# Altium PCB PCBV_DIY_2.PcbDoc
Units mm, origin at the board's own origin, x right, y up, seen from the top; angles counter-clockwise.
Board outline 30 x 30 mm, 2 copper layers (Top Layer, Bottom Layer); 35 components, 33 nets, 143 pads, 14 vias.
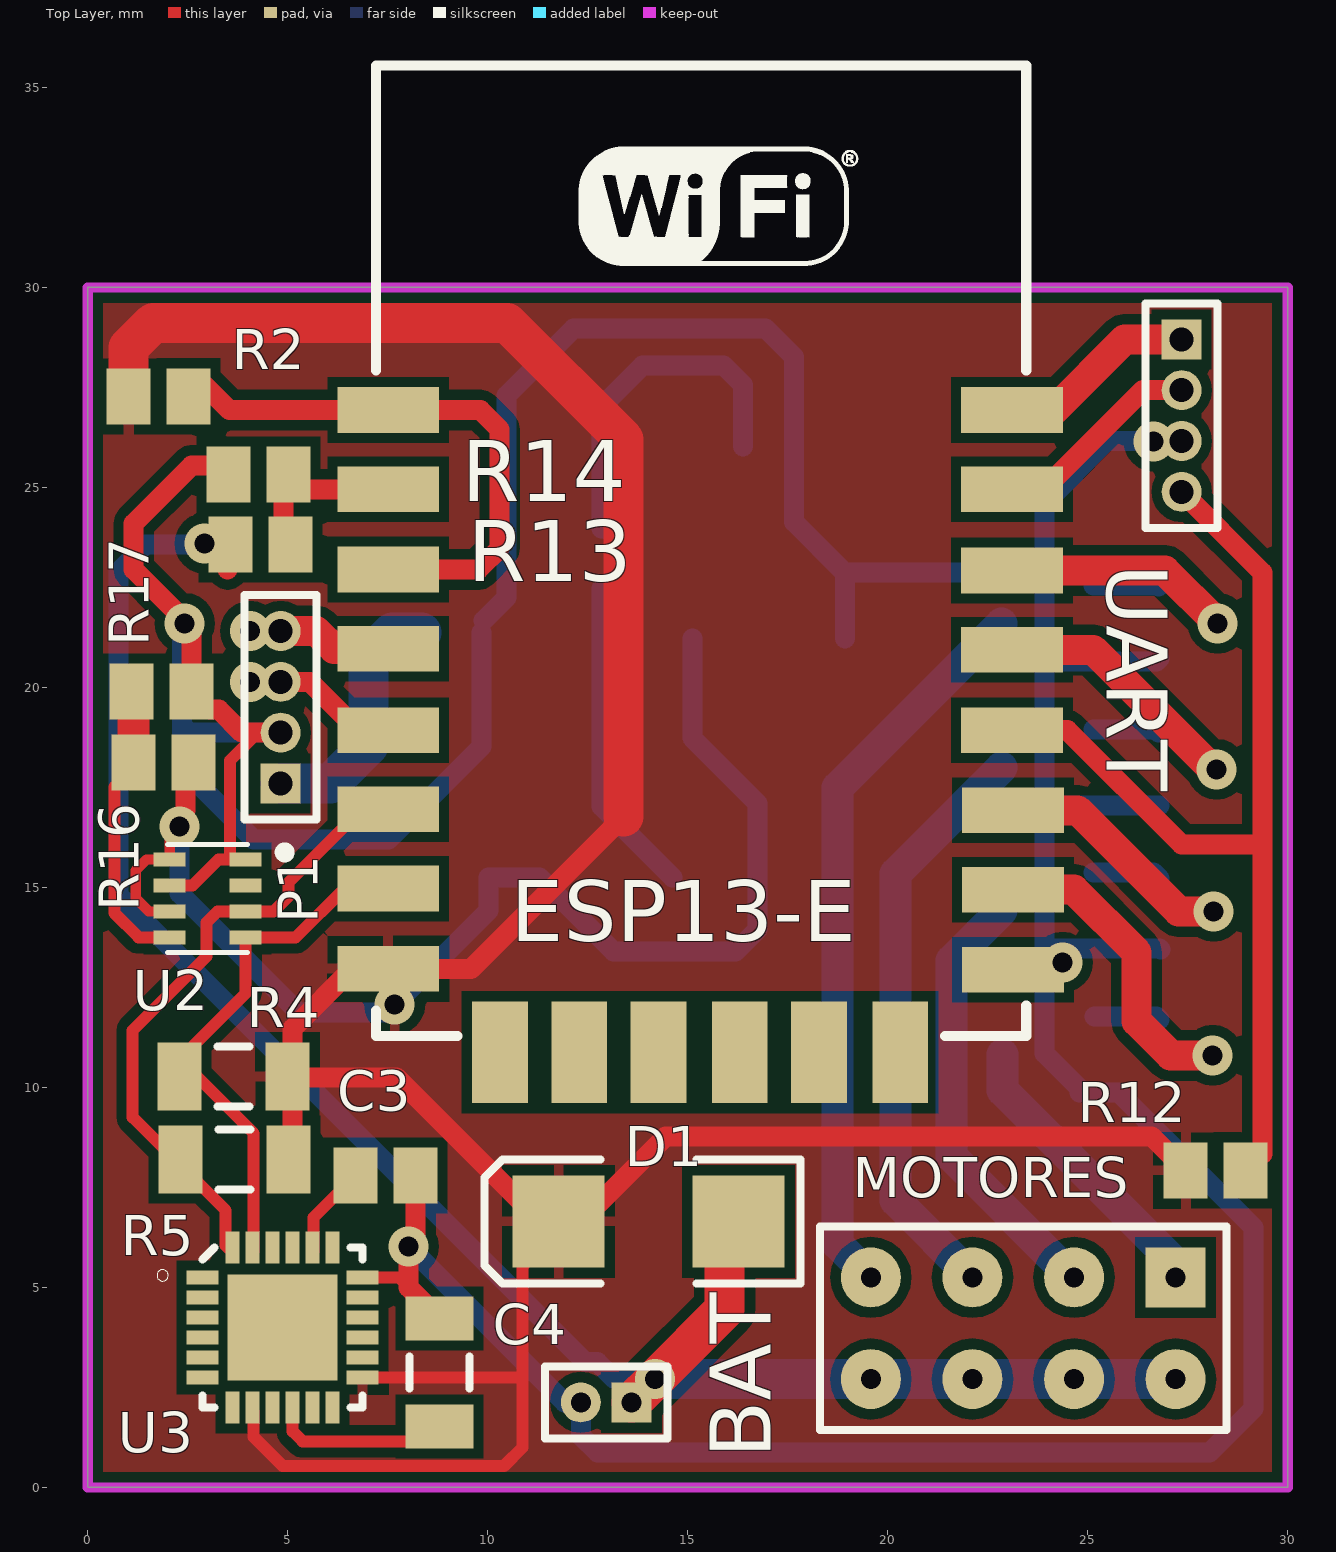
[diagram p0: Top Layer view]
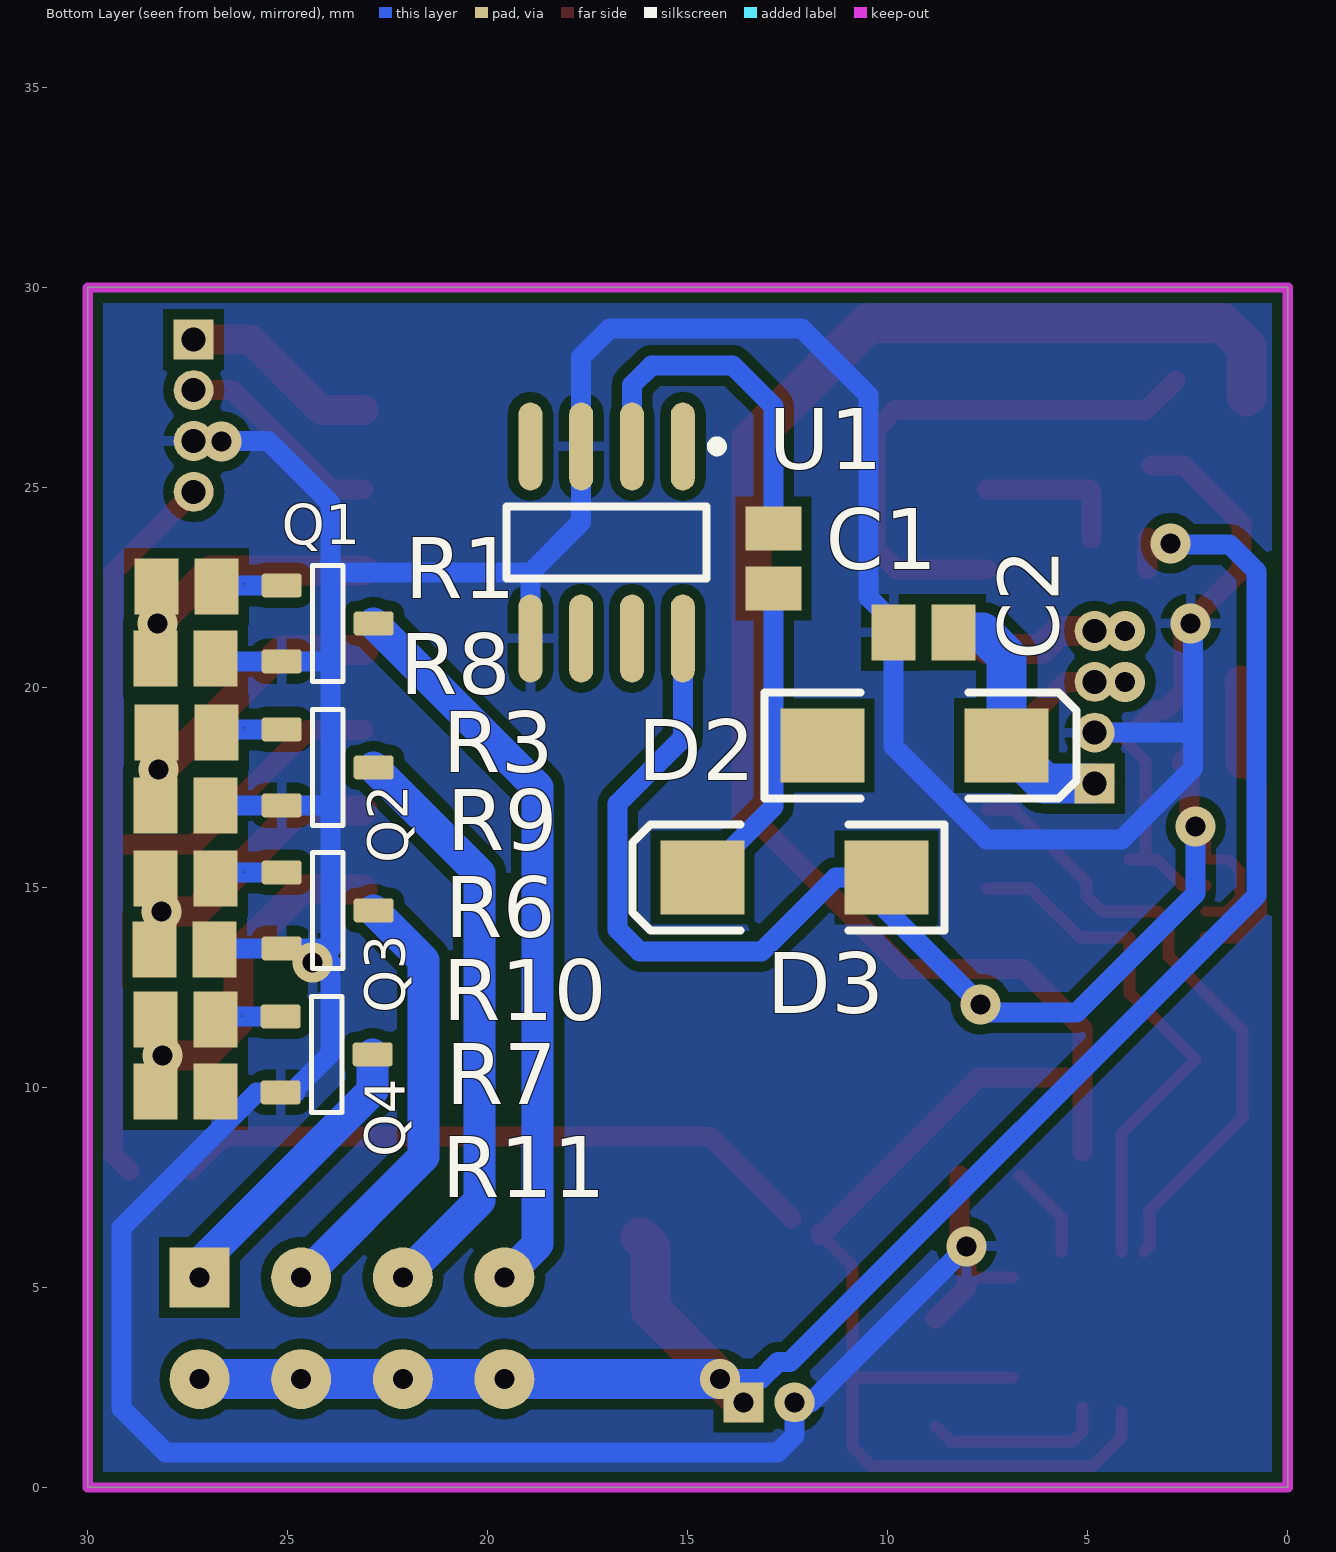
[diagram p1: Bottom Layer view, seen from below]

## Layer stack, top to bottom
Top Solder: solder mask 0.0102, Solder Resist, Dk 3.5
Top Layer: signal copper 0.0356
Dielectric 1: dielectric 0.32, FR-4, Dk 4.8
Bottom Layer: signal copper 0.0356
Bottom Solder: solder mask 0.0102, Solder Resist, Dk 3.5

## Board outline
0,0 30,0 30,30 0,30

## Design rules (kind name [scope] priority, off if disabled: settings)
Clearance [All] p1: gap=0.256 except(0.15: Arc-SMDPad Track-SMDPad SMDPad-SMDPad; 0.4: Arc-Region Track-Region SMDPad-Region THPad-Region Via-Region Fill-Region Poly-Region Region-Region)
PolygonConnect [All] p1: connectstyle=Relief reliefconductorwidth=0.254 reliefentries=4 polygonreliefangle="90 Angle" airgapwidth=0.254
RoutingVias [All] p1: holewidth=0.711 width=1.27 viastyle="Through Hole" minholewidth=0.711 minwidth=1.27 maxholewidth=0.711 maxwidth=1.27
SolderMaskExpansion [All] p1: expansion=0.102
Width [All] p1: maxlimit=2 minlimit=0.256 preferedwidth=0.5
30 further rules are at their usual default settings.

## Components (designator, comment, footprint, x,y, rotation, side; value= is the part's Value field where it differs from the comment)
BAT "Header 2" MHDR1X2 13.6,2.125 r180 top
C1 "Cap" C0805 12.85,23.225 r270 bottom
C2 "Cap" C0805 9.1,21.375 r180 bottom
C3 "Cap" C0805 7.45,7.8 r0 top
C4 "Cap" C1206 8.8,2.875 r90 top
D1 "Diode 1N5402" DSO-C2/X2.3 14.025,6.65 r180 top
D2 "Diode 1N5402" DSO-C2/Z6.7 9.325,18.55 r180 bottom
D3 "Diode 1N5402" DSO-C2/Z6.7 12.325,15.25 r0 bottom
ESP13-E "ESP8266 ESP-12-E" "ESP8266 ESP-12-E B" 24.1,10.525 r0 top
MOTORES "Header 4X2" HDR2X4 27.2,5.25 r180 top
P1 "MHDR1X4" MHDR1X4 4.825,17.6 r90 top
Q1 "MOSFET-N" SOT23-3 24,21.6 r180 bottom
Q2 "MOSFET-N" SOT23-3 24,18 r180 bottom
Q3 "MOSFET-N" SOT23-3 24,14.425 r180 bottom
Q4 "MOSFET-N" SOT23-3 24.025,10.825 r180 bottom
R1 "Res3" C0805 27.525,22.525 r180 bottom
R2 "Res3" C0805 1.775,27.275 r0 top
R3 "Res3" C0805 27.525,18.875 r180 bottom
R4 "Res3" C1206 3.65,10.275 r0 top
R5 "Res3" C1206 3.675,8.2 r0 top
R6 "Res3" C0805 27.55,15.225 r180 bottom
R7 "Res3" C0805 27.55,11.7 r180 bottom
R8 "Res3" C0805 27.55,20.725 r180 bottom
R9 "Res3" C0805 27.55,17.05 r180 bottom
R10 "Res3" C0805 27.575,13.45 r180 bottom
R11 "Res3" C0805 27.55,9.9 r180 bottom
R12 "Res3" C0805 28.2,7.925 r0 top
R13 "Res3" C0805 4.325,23.575 r0 top
R14 "Res3" C0805 4.275,25.325 r180 top
R16 "Res3" C0805 1.9,18.125 r0 top
R17 "Res3" C0805 1.85,19.9 r0 top
U1 "LMC7660IM" M08A_N 17.025,23.625 r270 bottom
U2 "BMP280" LGA-8_BMP280(Primary) 3,14.725 r0 top
U3 "MPU-6050" QFN50P400X400X95-25N 4.875,4 r0 top
UART "MHDR1X4" MHDR1X4 27.35,28.7 r270 top

## Footprints (in the part's own frame and the unit in brackets; to place one, negate y for a bottom-side part, rotate by r counter-clockwise, add the part's x,y. Pads: shape width x height; smd on the part's side, far side on the other; paste and mask are expansions set on the pad)
C0805 [mm] "Chip Capacitor, Body 2.0x1.3mm, IPC High Density"
  rect 1.1x1.4 smd: 1(-0.75,0) 2(0.75,0)
  body extent -1.1,-0.72 1.1,0.72, height 1.4
C1206 [mm] "Chip Capacitor, Body 3.2x1.6mm, IPC High Density"
  rect 1.1x1.7 smd: 1(-1.35,0) 2(1.35,0)
  silkscreen extent -0.4,-0.75 0.4,0.75, body extent -1.7,-0.9 1.7,0.9, height 1.3
DSO-C2/X2.3 [mm] "DO-214-AA/SMB; 2 C-Bend Leads; Body 5.3 x 3.6 mm, inc. leads (LxW)"
  rect 2.3x2.3 smd: 1(-2.25,0) 2(2.25,0)
  silkscreen extent -3.8,-1.55 4.1,1.55
DSO-C2/Z6.7 [mm] "DO-214-AC/SMA; 2 C-Bend Leads; Body 5.3 x 2.6 mm, inc. leads (LxW)"
  rect 2.1x1.85 smd: 1(-2.3,0) 2(2.3,0)
  silkscreen extent -3.75,-1.33 4.05,1.33
"ESP8266 ESP-12-E B" [mil] "ESP8266 ESP-12-E"
  rect 100x45 smd: 1(-653,646) 2(-653,568) 3(-653,489) 4(-653,411) 5(-653,331) 6(-653,253) 7(-653,175) 8(-653,96) 15(-38,95) 16(-38,174) 17(-38,252) 18(-39,331) 19(-39,410) 20(-39,488) 21(-39,568) 22(-39,646)
  rect 55x100 smd: 9(-543,14) 10(-465,14) 11(-387,14) 12(-307,14) 13(-229,14) 14(-149,14)
  silkscreen extent -665,30 -25,985
HDR2X4 [mm] "Connector; Header; 4x2 Position"
  rect 1.5x1.5 hole 0.5: 1(0,0)
  round 1.5 hole 0.5: 2(0,2.54) 3(2.54,0) 4(2.54,2.54) 5(5.08,0) 6(5.08,2.54) 7(7.62,0) 8(7.62,2.54)
  silkscreen extent -1.27,-1.27 8.89,3.81
LGA-8_BMP280(Primary) [mm]
  rect 0.8x0.35 smd paste-25.4 mask-25.4: 1(0.95,0.975) 2(0.95,0.325) 3(0.95,-0.325) 4(0.95,-0.975) 5(-0.95,-0.975) 6(-0.95,-0.325) 7(-0.95,0.325) 8(-0.95,0.975)
  silkscreen extent -1,-1.35 2.02,1.35
M08A_N [mm] "SOIC, 8-Leads, Body 4.9x3.9mm, Pitch 1.27mm, IPC Medium Density"
  oval 2.2x0.6 smd: 1(-2.4,1.905) 2(-2.4,0.635) 3(-2.4,-0.635) 4(-2.4,-1.905) 5(2.4,-1.905) 6(2.4,-0.635) 7(2.4,0.635) 8(2.4,1.905)
  silkscreen extent -2.52,-2.5 0.9,2.88, body extent -2,-2.5 2,2.5, height 1.75
MHDR1X2 [mm] "Connector; Header; 2 Position"
  rect 1x1 hole 0.5: 1(0,0)
  round 1 hole 0.5: 2(1.27,0)
  silkscreen extent -0.9,-0.9 2.17,0.9
MHDR1X4 [mm] "Connector; Header; 4 Position"
  rect 1x1 hole 0.6: 1(0,0)
  round 1 hole 0.6: 2(1.27,0) 3(2.54,0) 4(3.81,0)
  silkscreen extent -0.9,-0.9 4.71,0.9
QFN50P400X400X95-25N [mm]
  rect 0.8x0.35 smd paste-25.4 mask-25.4: 1(-2,1.25) 2(-2,0.75) 3(-2,0.25) 4(-2,-0.25) 5(-2,-0.75) 6(-2,-1.25) 13(2,-1.25) 14(2,-0.75) 15(2,-0.25) 16(2,0.25) 17(2,0.75) 18(2,1.25)
  rect 0.35x0.8 smd paste-25.4 mask-25.4: 7(-1.25,-2) 8(-0.75,-2) 9(-0.25,-2) 10(0.25,-2) 11(0.75,-2) 12(1.25,-2) 19(1.25,2) 20(0.75,2) 21(0.25,2) 22(-0.25,2) 23(-0.75,2) 24(-1.25,2)
  rect 2.75x2.65 smd mask-25.4: 25(0,0)
  silkscreen extent -3.14,-2 2,2
SOT23-3 [mm] "SOT23, 3 pin"
  round 0.5 on Mech15: 0(0,0)
  rrect25% 1x0.6 smd: 1(-1.15,0.95) 2(-1.15,-0.95) 3(1.15,0)
  silkscreen extent -0.38,-1.45 0.38,1.45, body extent -1.4,-1.45 1.4,1.45, height 1.29

## Part data
BAT: "Header, 2-Pin"
C1 C2 C3 C4: "Capacitor"
D1 D2 D3: "3 Amp General Purpose Rectifier"
MOTORES: "Header, 4-Pin, Dual row"
P1 UART: "Header, 4-Pin"
Q1 Q2 Q3 Q4: "N-Channel MOSFET"
R1 R2 R3 R4 R5 R6 R7 R8 R9 R10 R11 R12 R13 R14 R16 R17: "Resistor"
U1: "Switched Capacitor Voltage Converter, 8-pin Narrow SOIC"
U2: "Barometro"

## Via types
v1: diameter 1, hole 0.5, Top Layer to Bottom Layer, 14 vias

## Nets (pads, with @x,y where several pads share a name; then routed paths per layer and width w, separated by ;. In a path a pad name is that pad's centre, name@x,y a point inside that pad or via, vN(x,y) a via of type N, cw(c..) or ccw(c..) an arc to the next point about the centre after c; other vN are vias at no path point)
5VCC: C2.2 D2.2 P1.1 | length 6.4
  Bottom Layer w1: P1.1 6.075,17.6 D2.2 7.025,20.775 7.625,21.375 C2.2
ADC: ESP13-E.2 R13.2 R14.1 | length 3.8
  Top Layer w0.5: R13.2@4.9,23.725 4.9,24.9 4.952,24.952 ESP13-E.2
BOOT: ESP13-E.18 R12.2 UART.4 | length 25.4
  Top Layer w0.5: ESP13-E.18 24.493,18.932 27.35,16.075 29.366,16.075 ; UART.4 29.366,22.874 29.366,16.075 ; R12.2 29.366,8.341 29.366,16.075
ECHO: ESP13-E.4 P1.4 | length 2.9
  Top Layer w0.75: P1.4 5.715,21.41 6.161,20.964 ESP13-E.4
  other v1: 4.062,21.41
GND: BAT.2 C2.1 C3.2 C4.2 ESP13-E.15 P1.2 Q1.2 Q2.2 Q3.2 Q4.2 R8.2 R9.2 R10.2 R11.2 R14.2 R17.2 U1.3 U1.5 U2.1 U2.7 U3.18 UART.3 | length 128
  Top Layer w0.3: U2.7 2.625,15.05 3.275,15.7 ; U2.1 3.275,15.7 ; 4.242,18.858 3.556,18.171 3.556,15.7 3.275,15.7 ; U3.18 7.775,5.25 8.025,5
  Top Layer w0.5: R17.2 3.059,19.442 3.284,19.442 3.855,18.87 P1.2 ; R17.2@2.6,20.1 2.6,21.5 1.15,22.95 1.15,24.1 2.6,25.55 R14.2@3.4,25.55 ; C3.2 8.2,6.2 v1(8.025,6.025) 8.025,5 C4.2
  Bottom Layer w0.5: v1@2.363,21.6 2.363,19.05 ; P1.2 2.543,18.87 2.363,19.05 ; v1(8.025,6.025) 11.925,2.125 BAT.2 12.33,1.295 12.75,0.875 28.05,0.875 29.15,1.975 29.15,6.5 25.775,9.875 Q4.2 24.8,9.875 24.8,9.975 23.925,10.85 v1@23.925,13.125 ; C2.1 9.85,18.525 7.525,16.2 4.15,16.2 2.363,17.987 2.363,19.05 ; C2.1@9.9,21.675 10.475,22.25 10.475,27.3 12.15,28.975 16.95,28.975 17.66,28.265 U1.3 17.66,24.14 18.93,22.87 ; U1.5 18.93,22.87 ; R9.2 Q2.2 23.95,17.05 23.925,17.075 ; R8.2 26.725,20.65 Q1.2 23.925,20.65 ; R10.2 26.8,13.475 Q3.2 23.95,13.475 23.925,13.45 23.925,17.075 ; UART.3 25.485,26.16 23.925,24.6 23.925,22.9 ; 18.93,22.87 23.895,22.87 23.925,22.9 ; 23.925,17.075 23.925,20.65 ; 23.925,20.65 23.925,22.9
  other v1: 24.375,13.125 2.425,21.6 26.65,26.15
GPIO_1: ESP13-E.9
GPIO_2: ESP13-E.10
GPIO_3: ESP13-E.11
I2C_SCL: ESP13-E.7 R4.1 U2.4 U3.23 | length 13.4
  Top Layer w0.3: U3.23@4.15,5.9 4.15,8.85 2.3,10.7 3.95,12.35 U2.4 5.2,13.75 6.42,14.97 ESP13-E.7
I2C_SDA: ESP13-E.6 R5.1 U2.3 U3.24 | length 15.9
  Top Layer w0.3: U3.24@3.594,5.9 3.45,6.044 3.45,6.925 1.125,9.25 1.125,11.425 2.975,13.275 2.975,14.125 3.25,14.4 U2.3 4.65,14.4 5.025,14.775 5.025,15.125 6.851,16.951 ESP13-E.6
NetC1_1: C1.1 U1.2 | length 8.8
  Bottom Layer w0.5: C1.1 12.85,27.025 13.875,28.05 15.9,28.05 16.39,27.56 U1.2
NetC1_2: C1.2 D2.1 D3.2 | length 8
  Bottom Layer w0.5: C1.2 12.85,17.025 D3.2
NetC3_1: C3.1 U3.20 | length 2.3
  Top Layer w0.3: U3.20@5.65,5.9 5.65,6.75 C3.1
NetC4_1: C4.1 U3.10 | length 4.5
  Top Layer w0.3: U3.10 5.125,1.4 5.375,1.15 8.425,1.15 C4.1
NetESP13-E_1: ESP13-E.1 ESP13-E.3 R2.2 | length 14
  Top Layer w0.5: R2.2@2.8,27.675 3.542,26.933 ESP13-E.1 9.817,26.933 10.3,26.45 10.3,23.475 9.771,22.946 ESP13-E.3
NetMOTORES_1: MOTORES.1 Q4.3 | length 7.4
  Bottom Layer w0.8: Q4.3 22.875,9.925 27.2,5.6 MOTORES.1
NetMOTORES_3: MOTORES.3 Q3.3 | length 11
  Bottom Layer w0.8: Q3.3 21.6,13.175 21.6,8.269 24.619,5.25 MOTORES.3
NetMOTORES_5: MOTORES.5 Q2.3 | length 14.6
  Bottom Layer w0.8: MOTORES.5 20.2,7.17 20.2,15.35 Q2.3
NetMOTORES_7: MOTORES.7 Q1.3 | length 18.4
  Bottom Layer w0.8: MOTORES.7 18.75,6.08 18.75,17.5 Q1.3
NetQ1_2: Q1.1 R1.2 | length 1.6
  Bottom Layer w0.5: Q1.1 26.75,22.55 R1.2
NetQ2_2: Q2.1 R3.2 | length 1.7
  Bottom Layer w0.5: Q2.1 26.7,18.95 R3.2
NetQ3_2: Q3.1 R6.2 | length 1.7
  Bottom Layer w0.5: Q3.1 26.65,15.375 R6.2
NetQ4_2: Q4.1 R7.2 | length 1.7
  Bottom Layer w0.5: Q4.1 26.725,11.775 R7.2
NetR16_1: R16.1 R17.1 U2.5 | length 7.2
  Top Layer w0.3: R16.1@0.938,17.788 0.666,17.516 0.666,14.359 1.275,13.75 U2.5
  Top Layer w0.8: R16.1 1.15,20.125 R17.1@1.175,20.15
PWM0: ESP13-E.20 R1.1 R8.1 | length 5.7
  Top Layer w0.75: ESP13-E.20 26.93,22.92 v1(28.25,21.6)
PWM1: ESP13-E.19 R3.1 R9.1 | length 6.4
  Top Layer w0.75: ESP13-E.19 25.136,20.939 28.125,17.95 v1(28.225,17.95)
PWM2: ESP13-E.17 R6.1 R10.1 | length 6.1
  Top Layer w0.75: ESP13-E.17 24.749,16.926 27.274,14.401 v1(28.151,14.401)
PWM3: ESP13-E.16 R7.1 R11.1 | length 7.7
  Top Layer w0.75: ESP13-E.16 24.655,14.945 26.225,13.375 26.225,11.65 27.075,10.8 v1(28.125,10.8)
RX: ESP13-E.21 UART.2 | length 5.3
  Top Layer w0.5: ESP13-E.21 23.902,24.952 26.38,27.43 UART.2
TRIGER: ESP13-E.5 P1.3 | length 3.2
  Top Layer w0.5: P1.3 5.555,20.14 ESP13-E.5@6.763,18.932
  Top Layer w0.75: ESP13-E.5@6.763,18.932 ESP13-E.5
  other v1: 4.062,20.14
TX: ESP13-E.22 UART.1 | length 5
  Top Layer w0.75: ESP13-E.22 24.158,26.933 25.925,28.7 UART.1
VCC: D1.2 D3.1 ESP13-E.8 R2.1 R4.2 R5.2 R12.1 R16.2 U1.8 U2.6 U2.8 U3.8 U3.13 | length 113.5
  Top Layer w0.256: U2.6 1.525,14.4 1.2,14.725 1.2,15.425 1.475,15.7 U2.8 2.05,16.275 v1(2.3,16.525)
  Top Layer w0.3: U3.8@4.15,1.9 4.15,1.259 4.875,0.534 10.409,0.534 10.875,1 10.875,2.75 ; U3.13 10.875,2.75 ; D1.2@11.775,6.425 10.875,5.525 10.875,2.75
  Top Layer w0.5: v1(2.3,16.525) 2.3,16.775 2.45,16.925 2.45,17.925 R16.2 R16.2@2.425,18.35 ; R5.2@5.125,8.4 5.125,11.475 6.613,12.963 ESP13-E.8 9.588,12.963 13.4,16.775 ; R4.2@5.525,10.25 7.725,10.25 D1.2@11.662,6.313 ; D1.2@12.4,6.725 14.45,8.775 26.6,8.775 R12.1
  Top Layer w1: R2.1 1.025,28.5 1.641,29.116 10.484,29.116 13.4,26.2 13.4,16.775
  Bottom Layer w0.5: v1(2.3,16.525) 2.3,14.85 5.275,11.875 7.475,11.875 v1(7.675,12.075) 10.025,14.425 D3.1 11.3,15.25 13.15,13.4 16.2,13.4 16.75,13.95 16.75,17.1 15.12,18.73 U1.8
VCC_BAT: BAT.1 D1.1 MOTORES.2 MOTORES.4 MOTORES.6 MOTORES.8 R13.1 | length 48
  Top Layer w0.5: R13.1@3.5,22.95 R13.1@3.5,23.75
  Top Layer w1: BAT.1 v1(14.185,2.71) 15.925,4.45 15.925,6 D1.1@16.175,6.25
  Bottom Layer w0.5: v1(2.925,23.6) 2.95,23.575 1.45,23.575 0.775,22.9 0.775,14.8 12.444,3.131 12.747,3.131 13.168,2.71 v1(14.185,2.71)
  Bottom Layer w1: v1(14.185,2.71) MOTORES.8 MOTORES.6 MOTORES.4 MOTORES.2
pads on no net: ESP13-E.12 ESP13-E.13 ESP13-E.14 Q1.0 Q2.0 Q3.0 Q4.0 U1.1 U1.4 U1.6 U1.7 U2.2 U3.1 U3.2 U3.3 U3.4 U3.5 U3.6 U3.7 U3.9 U3.11 U3.12 U3.14 U3.15 U3.16 U3.17 U3.19 U3.21 U3.22 U3.25

## Polygon pours and split planes (outlines as drawn)
VCC on Top Layer "Plano_VCC" (solid, pour order 14): 0,30 30,30 30,0 0,0
GND on Bottom Layer "Plano_GND" (solid, pour order 16): 0,30 30,30 30,0 0,0

## Keep-outs
Keep-Out Layer:
  the board outline again, w0.256

## Text inside footprints (layer, text, board x,y; h text height)
ESP13-E: Mechanical 13 "ANTENNA AREA" at 7.515,34.924 h0.25; Mechanical 13 "CUTOUT POLYGON" at 7.515,34.416 h0.25